# Altium PCB PCB_Layout.PcbDoc
Units mil, origin at the board's own origin, x right, y up, seen from the top; angles counter-clockwise.
Board outline 2880.03 x 1910.03 mil, 2 copper layers (Top Layer, Bottom Layer); 34 components, 53 nets, 148 pads, 0 vias.
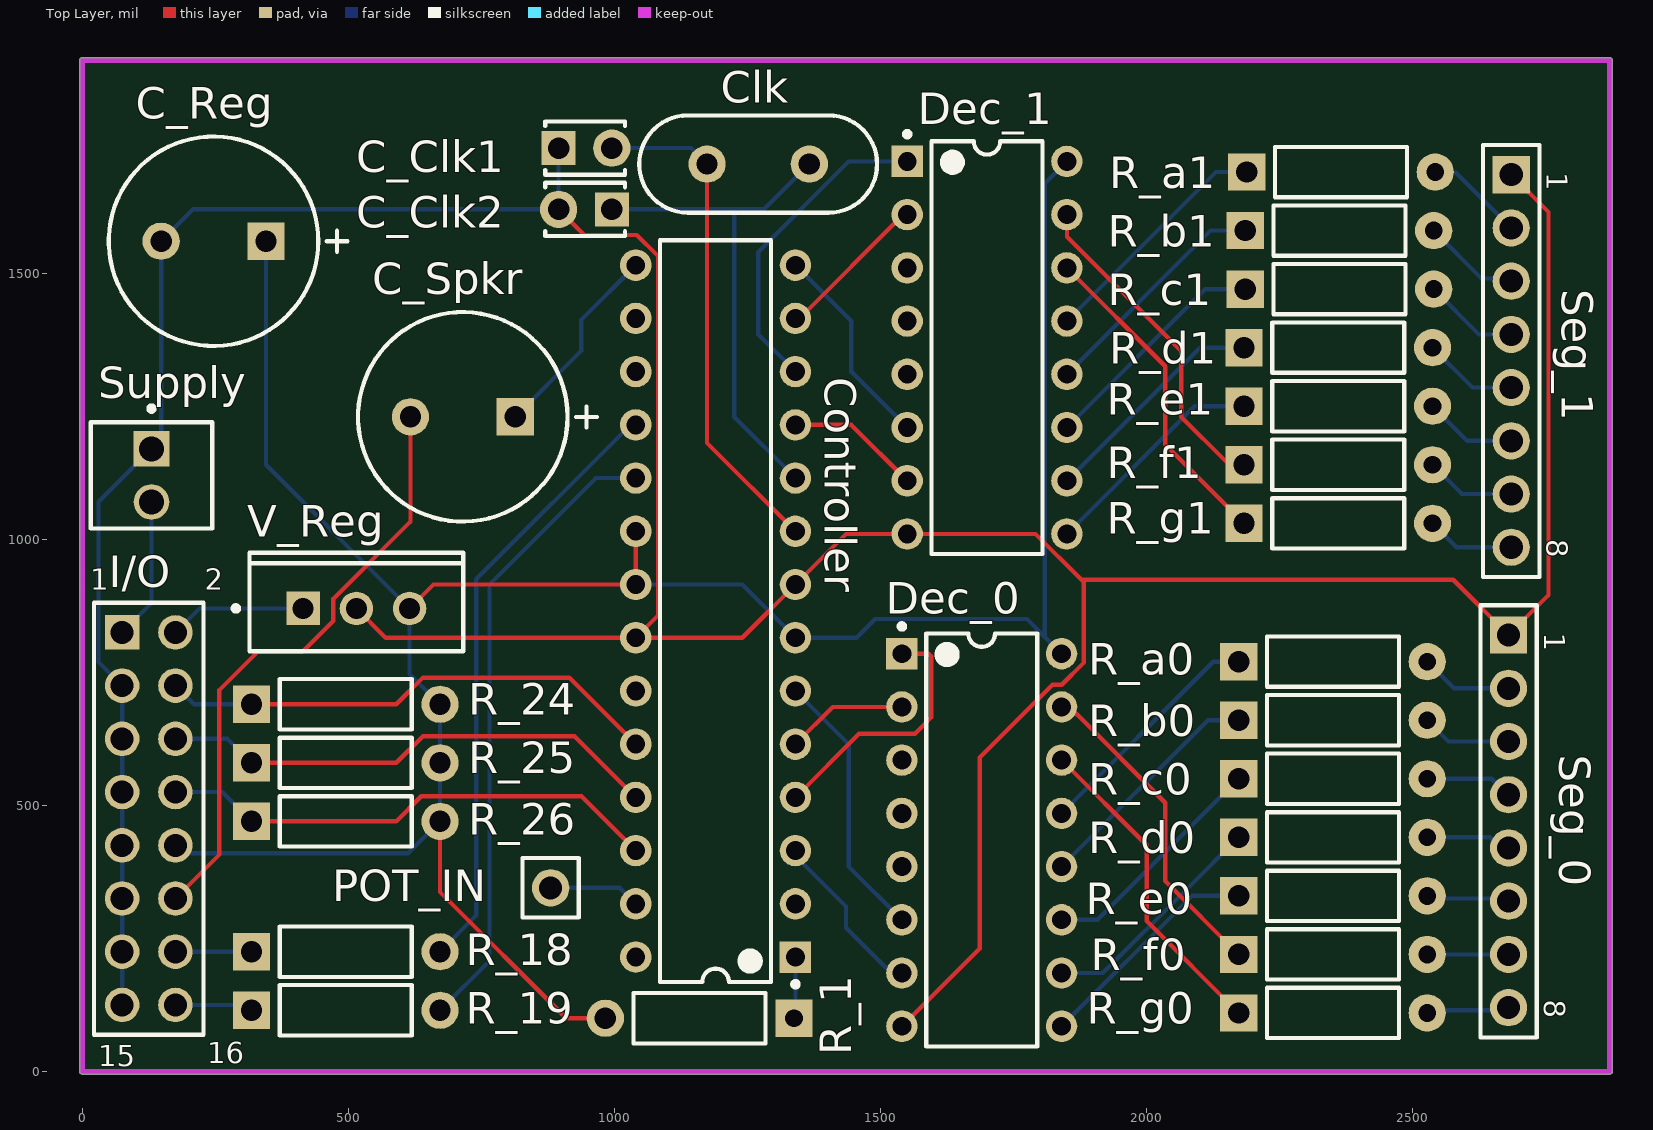
[diagram p0: Top Layer view]
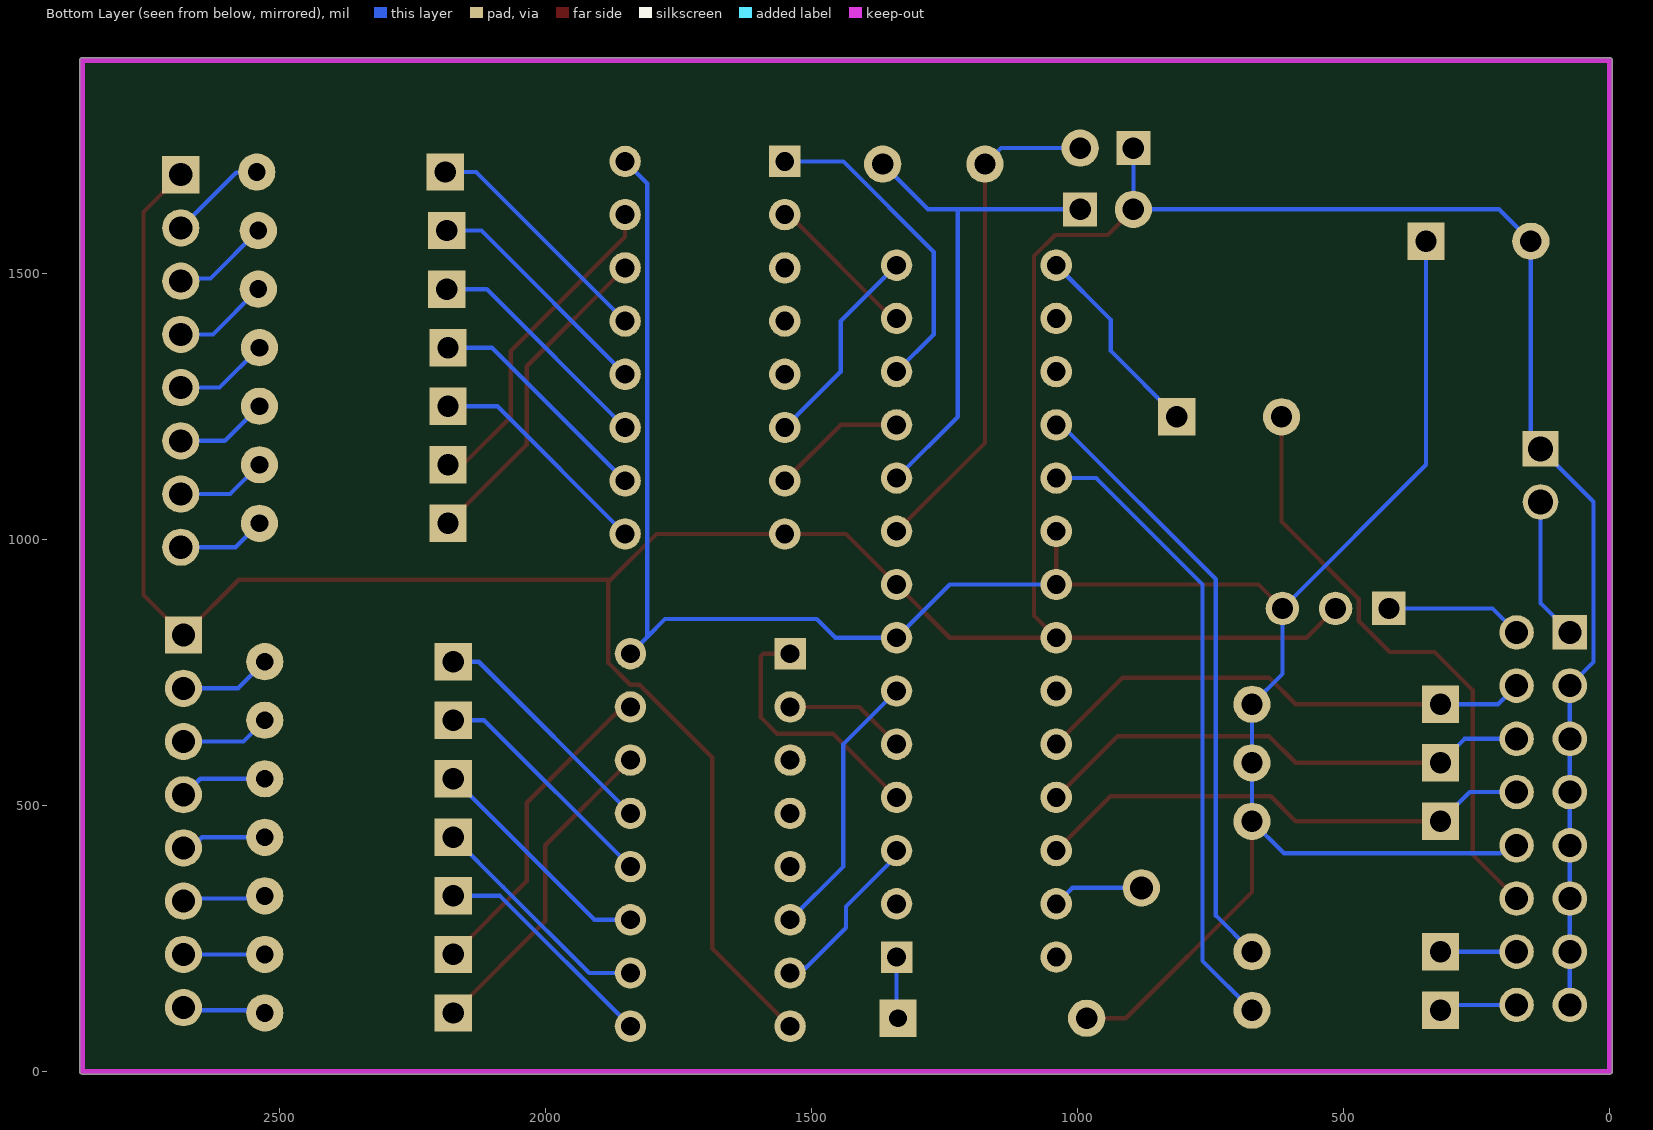
[diagram p1: Bottom Layer view, seen from below]

## Layer stack, top to bottom
Top Solder: solder mask 0.4, Solder Resist, Dk 3.5
Top Layer: signal copper 1.4
Dielectric 1: dielectric 12.6, FR-4, Dk 4.8
Bottom Layer: signal copper 1.4
Bottom Solder: solder mask 0.4, Solder Resist, Dk 3.5

## Board outline
0,-5.01 cw(c0,0) -5.01,0 -5.01,1900 cw(c0,1900) 0,1905.01 2870,1905.01 cw(c2870,1900) 2875.01,1900 2875.01,0 cw(c2870,0) 2870,-5.01

## Design rules (kind name [scope] priority, off if disabled: settings)
BoardOutlineClearance [All] p1: gap=7.87 ignorepadtopadclearanceinfootprint=FALSE
Clearance [All] p1: gap=8 ignorepadtopadclearanceinfootprint=FALSE except(9.84: Arc-Hole Track-Hole SMDPad-Hole THPad-Hole Via-Hole Fill-Hole Poly-Hole Region-Hole)
ComponentClearance [All] p1: gap=5 collisioncheckmode=3 verticalgap=5 showdistances=TRUE
DiffPairsRouting [All] p1: maxlimit=15 minlimit=8 mostfreqgap=8 toplayer_minwidth=8 toplayer_maxwidth=1000 toplayer_prefwidth=8 bottomlayer_minwidth=8 bottomlayer_maxwidth=1000 bottomlayer_prefwidth=8 maxuncoupledlength=8
Height [All] p1: minheight=0 maxheight=71497.94 prefheight=71497.94
HoleSize [All] p1: absolutevalues=TRUE maxlimit=248.03 minlimit=11.81 maxpercent=80.000 minpercent=20.000
HoleToHoleClearance [All] p1: gap=9.84 allowstackedmicrovias=TRUE
LayerPairs [All] p1: enforce=FALSE
MinimumAnnularRing [All] p1: minimumring=10
MinimumSolderMaskSliver [All] p1: minsoldermaskwidth=0
PlaneConnect PlaneConnectPowerPads [InPadClass('PowerPads')] p1: planeconnectstyle=Direct reliefexpansion=20 reliefentries=4 reliefconductorwidth=10 reliefairgap=10
PlaneConnect [All] p2: pad.planeconnectstyle=Relief pad.reliefexpansion=11.81 pad.reliefentries=4 pad.reliefconductorwidth=8 pad.reliefairgap=8 via.planeconnectstyle=Direct via.reliefexpansion=11.81 via.reliefentries=4 via.reliefconductorwidth=5 via.reliefairgap=10
PolygonConnect PolygonConnectPowerPads [All vs (InPadClass('PowerPads'))] p1: connectstyle=Direct reliefconductorwidth=10 reliefentries=4 polygonreliefangle="90 Angle" airgapwidth=10
PolygonConnect [All] p2: thpad.connectstyle=Relief thpad.reliefconductorwidth=8 thpad.reliefentries=4 thpad.polygonreliefangle="90 Angle" thpad.airgapwidth=8 smdpad.connectstyle=Relief smdpad.reliefconductorwidth=8 smdpad.reliefentries=4 smdpad.polygonreliefangle="90 Angle" smdpad.airgapwidth=8 via.connectstyle=Direct via.reliefconductorwidth=5 via.reliefentries=4 via.polygonreliefangle="90 Angle" via.airgapwidth=10
RoutingVias [All] p1: holewidth=11.81 width=23.62 viastyle="Through Hole" minholewidth=11.81 minwidth=23.62 maxholewidth=23.62 maxwidth=50
SilkToSilkClearance [All] p1: silktosilkclearance=0
SilkToSolderMaskClearance [IsPad] p1: minsilkscreentomaskgap=5 clearancetoexposedcopper=TRUE
SolderMaskExpansion [All] p1: expansion=4 istentingtop=FALSE
Width [All] p1: maxlimit=1000 minlimit=8 preferedwidth=8 minimp=50.000000 maximp=50.000000 favimp=50.000000
20 further rules are at their usual default settings.

## Components (designator, comment, footprint, x,y, rotation, side; value= is the part's Value field where it differs from the comment)
C_Clk1 "C315C220K1G5TA" KEMT-C315-THT-2 945,1735 r0 top
C_Clk2 "C315C220K1G5TA" KEMT-C315-THT-2 945,1620 r180 top
C_Reg "EEU-EE2G100" PNSC-EEU-EE2G100-2_V 246.57,1560 r180 top
C_Spkr "EEU-EE2G100" PNSC-EEU-EE2G100-2_V 715,1230 r180 top
Clk "FOXSLF/120-20" FOX-FOXSLF-2_V 1270,1705 r0 top
Controller "ATmega328-PU" 28P3 1190,865 r180 top
Dec_0 "SN74LS247N" N0016A 1690,435 r0 top
Dec_1 "SN74LS247N" N0016A 1700,1360 r0 top
I/O "61301621121" 61301621121 125,475 r270 top
POT_IN "61300111121" 61300111121 880,345 r90 top
R_1 "MFR-25FBF52-1K" RESA60-630X240#1 1160,100 r180 top
R_18 "FR-25FF52-1K" RESA60-630X240#2 495,225 r0 top
R_19 "MFR-25FBF52-1K" RESA60-630X240#2 495,115 r0 top
R_24 "MFR-25FBF52-1K" RESA60-630X240#2 495,690 r0 top
R_25 "MFR-25FBF52-1K" RESA60-630X240#2 495,580 r0 top
R_26 "MFR-25FBF52-1K" RESA60-630X240#2 495,470 r0 top
R_a0 "MFR-25FBF52-1K" RESA60-630X240#3 2350,770 r0 top
R_a1 "MFR-25FBF52-1K" RESA60-630X240#3 2365,1690 r0 top
R_b0 "MFR-25FBF52-1K" RESA60-630X240#3 2350,660 r0 top
R_b1 "MFR-25FBF52-1K" RESA60-630X240#3 2362.17,1580 r0 top
R_c0 "MFR-25FBF52-1K" RESA60-630X240#3 2350,550 r0 top
R_c1 "MFR-25FBF52-1K" RESA60-630X240#3 2362.17,1470 r0 top
R_d0 "MFR-25FBF52-1K" RESA60-630X240#3 2350,440 r0 top
R_d1 "MFR-25FBF52-1K" RESA60-630X240#3 2360,1360 r0 top
R_e0 "MFR-25FBF52-1K" RESA60-630X240#3 2350,330 r0 top
R_e1 "MFR-25FBF52-1K" RESA60-630X240#3 2360,1250 r0 top
R_f0 "MFR-25FBF52-1K" RESA60-630X240#3 2350,220 r0 top
R_f1 "MFR-25FBF52-1K" RESA60-630X240#3 2360,1140 r0 top
R_g0 "MFR-25FBF52-1K" RESA60-630X240#3 2350,110 r0 top
R_g1 "MFR-25FBF52-1K" RESA60-630X240#3 2360,1030 r0 top
Seg_0 "61300811121" 61300811121 2680,470 r270 top
Seg_1 "61300811121" 61300811121 2685,1335 r270 top
Supply "22-27-2021" MOLX-22-27-2021_V 130,1120 r270 top
V_Reg "LM7805CT" FAIR-TO-220-3 515,870 r90 top

## Footprints (in the part's own frame and the unit in brackets; to place one, negate y for a bottom-side part, rotate by r counter-clockwise, add the part's x,y. Pads: shape width x height; smd on the part's side, far side on the other; paste and mask are expansions set on the pad)
28P3 [mm] "28-Pin Plastic Dual In-Line Package (PDIP)"
  rect 1.5x1.5 hole 0.9: 1(-3.81,16.51)
  round 1.5 hole 0.9: 2(-3.81,13.97) 3(-3.81,11.43) 4(-3.81,8.89) 5(-3.81,6.35) 6(-3.81,3.81) 7(-3.81,1.27) 8(-3.81,-1.27) 9(-3.81,-3.81) 10(-3.81,-6.35) 11(-3.81,-8.89) 12(-3.81,-11.43) 13(-3.81,-13.97) 14(-3.81,-16.51) 15(3.81,-16.51) 16(3.81,-13.97) 17(3.81,-11.43) 18(3.81,-8.89) 19(3.81,-6.35) 20(3.81,-3.81) 21(3.81,-1.27) 22(3.81,1.27) 23(3.81,3.81) 24(3.81,6.35) 25(3.81,8.89) 26(3.81,11.43) 27(3.81,13.97) 28(3.81,16.51)
  silkscreen extent -3.94,-17.7 2.65,17.93, body extent -3.6,-17.65 3.6,17.65, height 4.58
61300111121 [mil] "Pin Header, pitch 2.54 mm, THT, Vertical, single row, 1p"
  round 70 hole 43.31: 1(0,0)
  silkscreen extent -56,-53 56,53, body extent -50,-50 50,50, height 337
61300811121 [mil] "Pin Header, pitch 2.54 mm, THT, Vertical, single row, 8p"
  rect 70x70 hole 43.31: 1(-350,0)
  round 70 hole 43.31: 2(-250,0) 3(-150,0) 4(-50,0) 5(50,0) 6(150,0) 7(250,0) 8(350,0)
  silkscreen extent -406,-53 406,53, body extent -400,-50 400,50, height 337
61301621121 [mm] "Pin Header, pitch 2.54 mm, THT, Vertical, dual row, 16p"
  rect 1.65x1.65 hole 1.1: 1(-8.89,-1.27)
  round 1.65 hole 1.1: 2(-8.89,1.27) 3(-6.35,-1.27) 4(-6.35,1.27) 5(-3.81,-1.27) 6(-3.81,1.27) 7(-1.27,-1.27) 8(-1.27,1.27) 9(1.27,-1.27) 10(1.27,1.27) 11(3.81,-1.27) 12(3.81,1.27) 13(6.35,-1.27) 14(6.35,1.27) 15(8.89,-1.27) 16(8.89,1.27)
  silkscreen extent -10.31,-2.62 10.31,2.62, body extent -10.16,-2.54 10.16,2.54, height 8.59
FAIR-TO-220-3 [mm] "FM, 3-Leads, Body 10.2x4.7mm, Pitch 2.54mm"
  rect 1.6x1.6 hole 1: 1(0,2.54)
  round 1.6 hole 1: 2(0,0) 3(0,-2.54)
  silkscreen extent -2.04,-5.1 2.66,5.87, body extent -2.04,-5.1 2.66,5.1, height 18.95
FOX-FOXSLF-2_V [mil] "THD, 2-Leads, Body 11.35x4.65mm, Pitch 4.88mm"
  round 70 hole 40: 1(-96.06,0) 2(96.06,0)
  silkscreen extent -223,-92 223,92, body extent -223,-92 223,92, height 142
KEMT-C315-THT-2 [mil] "THD, 2-Leads, Body 3.81x2.54mm"
  rect 64x64 hole 40: 1(-50,0)
  round 70 hole 40: 2(50,0)
  silkscreen extent -75,-50 75,50, body extent -75,-50 75,50, height 183
MOLX-22-27-2021_V [mm] "Header, 2-Leads, Body 5.8x5.08mm"
  rect 1.7x1.7 hole 1.19: 1(-1.27,0)
  round 1.7 hole 1.19: 2(1.27,0)
  silkscreen extent -3.31,-2.9 2.54,2.9, body extent -2.54,-2.9 2.54,2.9, height 11.72
N0016A [mm] "DIP, 16-Leads, Body 19.7x6.6mm, Pitch 2.54mm"
  rect 1.5x1.5 hole 0.9: 1(-3.81,8.89)
  round 1.5 hole 0.9: 2(-3.81,6.35) 3(-3.81,3.81) 4(-3.81,1.27) 5(-3.81,-1.27) 6(-3.81,-3.81) 7(-3.81,-6.35) 8(-3.81,-8.89) 9(3.81,-8.89) 10(3.81,-6.35) 11(3.81,-3.81) 12(3.81,-1.27) 13(3.81,1.27) 14(3.81,3.81) 15(3.81,6.35) 16(3.81,8.89)
  silkscreen extent -3.93,-9.85 2.65,10.31, body extent -3.95,-9.85 3.95,9.85, height 5.08
PNSC-EEU-EE2G100-2_V [mil] "Through-hole, 2-Leads, Base 10x10mm, Height 22mm"
  rect 70x70 hole 40: 1(-98.43,0)
  round 70 hole 40: 2(98.43,0)
  silkscreen extent -252,-197 197,197, body extent -197,-197 197,197, height 866
RESA60-630X240#1 [mil] "Axial Resistor, 2-Leads, Dia 2.4mm, Body Length 6.3mm"
  rect 70x70 hole 33.46: 1(-177.17,0)
  round 70 hole 40: 2(177.17,0)
  silkscreen extent -124,-47 124,47, body extent -124,-47 124,47, height 94
RESA60-630X240#2 [mil] "Axial Resistor, 2-Leads, Dia 2.4mm, Body Length 6.3mm"
  rect 70x70 hole 40: 1(-177.17,0)
  round 70 hole 40: 2(177.17,0)
  silkscreen extent -124,-47 124,47, body extent -124,-47 124,47, height 94
RESA60-630X240#3 [mil] "Axial Resistor, 2-Leads, Dia 2.4mm, Body Length 6.3mm"
  rect 70x70 hole 40: 1(-177.17,0)
  round 70 hole 33.46: 2(177.17,0)
  silkscreen extent -124,-47 124,47, body extent -124,-47 124,47, height 94

## Part data
C_Clk1 C_Clk2: library part CMP-1664-00008-1, "Capacitor, Ceramic, 22 pF, +/-10 %, 100 V, -55 to 125 degC, 2-Pin THD, RoHS, Bulk", Case\Package=TO-220, Max Input Voltage="40 V", Max Operating Temperature="125 degC", Max Ouput Current="1.5 A", Min Input Voltage="4.2 V", Min Operating Temperature="0 degC", Output Voltage="1.2 V", Package Quantity=50, ComponentLink1Description="Manufacturer URL", ComponentLink1URL=http://www.kemet.com/, ComponentLink2Description=Datasheet, ComponentLink2URL=http://capacitoredge.kemet.com/capedge2/DataSheet/Datasheet-C315C220K1G5TA.pdf?pn=C315C220K1G5TA{BULK}, DatasheetVersion=Aug-16, Height="9.28 mm", Length="10.28 mm", Mount="Through Hole", Output Current="1.5 A", Outputs=1, PackageDescription="2-Pin Through Hole Device, Body 3.81 x 2.54 mm", PackageReference=C315-THT-2, Packaging=Rail/Tube, Pins=3, Radiation Hardening=No, REACH SVHC="No SVHC", RoHSCompliant=true, Weight="0.08113 oz", Width="4.82 mm"
C_Reg C_Spkr: library part CMP-0736-00002-1, "Aluminum Electrolytic Capacitor, 10 uF +/- 20%, 400 V, -25 to 105 degC, 2-Pin 10 x 10 x 22 mm Through-hole, RoHS, Tape and Reel", Capacitance Tolerance="+/- 20%", Manufacturer=Panasonic, Rated Voltage="400 V", Ripple Current="430 mA", Temp. Range="-25 to 105 degC", Cap.="10 uF", ComponentLink1Description="Manufacturer URL", ComponentLink1URL=http://industrial.panasonic.com/, ComponentLink2Description=Datasheet, ComponentLink2URL=http://industrial.panasonic.com/www-data/pdf/ABA0000/ABA0000CE113.pdf, ComponentLink3Description="Package Specification", ComponentLink3URL=http://industrial.panasonic.com/www-data/pdf/ABA0000/ABA0000PE245.pdf, DatasheetVersion=Nov-12, Mounting Technology="Through Hole", PackageDescription="2-Pin Through-hole, Base 10 x 10 mm, Height 22 mm", PackageReference=EEU-EE2G100-2, PackageVersion=Nov-12, Packing="Tape and Reel", PartNumber=EEU-EE2G100, RoHS=TRUE
Clk: library part CMP-1749-00004-1, "Resistance Weld Thru-Hole Crystal, 12 MHz, +/-30 ppm, -20 to 70 degC, 2-Pin THD, RoHS, Bulk", Case\Package=TO-251-3, Input Capacitance="350 pF", Max Operating Temperature="150 degC", Max Power Dissipation="2.5 W", Min Operating Temperature="-55 degC", Package Quantity=70, ComponentLink1Description="Manufacturer URL", ComponentLink1URL=http://www.foxonline.com/, ComponentLink2Description=Datasheet, ComponentLink2URL=http://www.foxonline.com/pdfs/hc49slf.pdf, DatasheetVersion=Mar-15, Elements=1, Height="6.1 mm", Length="6.6 mm", Mount="Through Hole", PackageDescription="2-Pin Through Hole Device, Body 11.35 x 4.65 mm, Pitch 4.88 mm", PackageReference=FOXSLF-2, Packaging=Rail/Tube, Pins=3, Radiation Hardening=No, Rds On Max="115 mohm", REACH SVHC="No SVHC", RoHSCompliant=true, Typical Rise Time="90 ns", Width="2.3 mm"
Controller: library part CMP-0095-00015-2, "8-bit AVR Microcontroller, 32KB Flash, 1KB EEPROM, 2KB SRAM, 28-pin PDIP, Industrial Grade (-40°C to 85°C)", ComponentLink1Description="Manufacturer URL", ComponentLink1URL=http://www.atmel.com/, ComponentLink2Description="ATmega48A/48PA/88A/88PA/168A/168PA/328/328P Datasheet", ComponentLink2URL=http://www.atmel.com/dyn/resources/prod_documents/8271.pdf, ComponentLink3Description="ATmega48A/48PA/88A/88PA/168A/168PA/328/328P Summary", ComponentLink3URL=http://www.atmel.com/dyn/resources/prod_documents/8271S.pdf, DatasheetVersion="revD, May-2011", PackageDescription="28-lead (0.300\"/7.62mm Wide) Plastic Dual Inline Package (PDIP)", PackageReference=28P3, PackageVersion="revB, Sep-2001", RevisionNote="DatasheetVersion updated. URLs added."
Dec_0 Dec_1: library part CMP-0388-00310-2, "BCD-to-7-Segment Decoder / Driver, 4.75 to 5.25 V, 0 to 70 degC, 16-pin DIP (N16), Pb-Free (RoHS)", Manufacturer="Texas Instruments", Rating=Catalog, Code_JEDEC=MS-001, ComponentLink1Description="Manufacturer URL", ComponentLink1URL=http://www.ti.com/, ComponentLink2Description=Datasheet, ComponentLink2URL=http://www.ti.com/general/docs/lit/getliterature.tsp?genericPartNumber=SN74LS247&fileType=pdf, ComponentLink3Description="Package Specification", ComponentLink3URL=http://www.ti.com/litv/pdf/mpdi002c, DatasheetVersion=SDLS083, Eco-Plan="Pb-Free (RoHS)", Mounting Technology="Through Hole", PackageDescription="16-Pin Plastic In-Line, Body 19.305 x 6.35 mm, Pitch 2.54 mm", PackageReference=N0016A, PackageVersion=4040049/E, PartNumber=SN74LS247N, SubFamily="Discrete Segment LED Driver", Vin(Max)(V)=5.25, Vin(Min)(V)=4.75
I/O: library part CMP-1502-01097-1, "THT Vertical Pin Header WR-PHD, Pitch 2.54 mm, Dual Row, 16 pins", Contact Resistance=20mOhm, Manufacturer="Wurth Elektronik", Operating Temperature=-40to105degC, Rated Current=3A, Withstanding Voltage=500VAC, Working Voltage=250VAC, Datasheet URL=https://katalog.we-online.de/em/datasheet/6130xx21121.pdf, Gender=Male, Manufacturer URL=http://www.we-online.de, Mounting Technology=THT, Orientation=Vertical, Package Reference=61301621121, Packaging=Bag, Part Number=61301621121, Pin Number=16, Pitch=2.54mm, Publisher=WurthElektronik, Row Number=Dual
POT_IN: library part CMP-1502-01058-1, "THT Vertical Pin Header WR-PHD, Pitch 2.54 mm, Single Row, 1 pins", Contact Resistance=20mOhm, Manufacturer="Wurth Elektronik", Operating Temperature=-40to105degC, Rated Current=3A, Withstanding Voltage=500VAC, Working Voltage=250VAC, Datasheet URL=https://katalog.we-online.de/em/datasheet/6130xx11121.pdf, Gender=Male, Manufacturer URL=http://www.we-online.de, Mounting Technology=THT, Orientation=Vertical, Package Reference=61300111121, Packaging=Bag, Part Number=61300111121, Pin Number=1, Pitch=2.54mm, Publisher=WurthElektronik, Row Number=Single
R_1 R_18 R_19 R_24 R_25 R_26 R_a0 R_a1 R_b0 R_b1 R_c0 R_c1 R_d0 R_d1 R_e0 R_e1 R_f0 R_f1 R_g0 R_g1: library part CMP-1659-00075-1, "Axial Resistor, 1 KOhm, +/- 1%, 250 mW, -55 to 155 degC, 2-Pin THD, RoHS, Bulk", Case\Package=Axial, Max Operating Temperature="155 degC", Min Operating Temperature="-55 degC", Package Quantity=200, Power Rating="250 mW", Resistance="10 kohm", Tolerance=1%, Voltage Rating="250 V", ComponentLink1Description="Manufacturer URL", ComponentLink1URL=http://www.yageo.com/, ComponentLink2Description=Datasheet, ComponentLink2URL=http://www.yageo.com/documents/recent/Yageo%20LR_MFR_2013.pdf, DatasheetVersion=Apr-13, Length="0.248 inch", PackageDescription="2-Pin Axial Lead, Dia 2.4 mm, Body Length 6.3 mm", PackageReference=MFR-25, Packaging=Bulk, RoHSCompliant=true
Seg_0 Seg_1: library part CMP-1502-01076-1, "THT Vertical Pin Header WR-PHD, Pitch 2.54 mm, Single Row, 8 pins", Contact Resistance=20mOhm, Manufacturer="Wurth Elektronik", Operating Temperature=-40to105degC, Rated Current=3A, Withstanding Voltage=500VAC, Working Voltage=250VAC, Datasheet URL=https://katalog.we-online.de/em/datasheet/6130xx11121.pdf, Gender=Male, Manufacturer URL=http://www.we-online.de, Mounting Technology=THT, Orientation=Vertical, Package Reference=61300811121, Packaging=Bag, Part Number=61300811121, Pin Number=8, Pitch=2.54mm, Publisher=WurthElektronik, Row Number=Single
Supply: library part CMP-2000-05537-1, "Male Header, Pitch 2.54 mm, 1 x 2 Position, Height 11.7 mm, Tail Length 3.56 mm, 0 to 75 degC, RoHS, Bulk", Current - Max=4A, Manufacturer=Molex, Operating Temperature=0°Cto+75°C, Package Description="2-Leads Header, Body 5.08 x 5.8 mm, Pitch 2.54 mm", Package Version="Rev. BC, 02/2012", PartNumber=0022272021, Voltage - Max=250V, Contact Material=Tinplatedbrass, Current Rating=4A, Datasheet URL=http://www.molex.com/pdm_docs/sd/022272021_sd.pdf, Datasheet Version="Rev. F, 06/2009", Housing material=Nylon(UL94V-0), Manufacturer URL=http://www.molex.com/, Mounting Technology=ThroughHole, No. of Positions=2, No. of Rows=1, Orientation=Vertical, Package Reference=22-27-2021, Pitch=2.54mm, Voltage Rating=250V
V_Reg: library part CMP-2000-04938-1, "Positive Voltage Regulator, 5 V, 1 A, -40 to 125 degC, 3-Pin TO-220, RoHS, Tube", Manufacturer=FairchildSemiconductor, Maximum Input Voltage=35V, Maximum Output Current=2.2(Typ)A, Maximum Quiescent Current=8mA, Operating Temperature=-40to125degC, Output Voltage=5V, Package=3TO-220AB, Package Description="3-Pin Through Hole Device, Body 10 x 4.5 mm, Pitch 2.54 mm", Package Reference=TO-220, Typical Dropout Voltage @ Current=2@1AV, Accuracy=±4%, Category=LinearRegulator, Datasheet URL=https://datasheet.ciiva.com/26904/lm7805ct-26904988.pdf, Datasheet Version=Aug-12, Line Regulation=100mV, Load Regulation=100mV, Manufacturer URL=https://www.fairchildsemi.com/, Mounting=ThroughHole, Number of Outputs=1, Output Type=Fixed, Package URL=https://www.fairchildsemi.com/package-drawings/TO/TO220B03.pdf, Packaging=Rail/Tube, Polarity=Positive, Rad Hard=No, Type=Linear

## Nets (pads, with @x,y where several pads share a name; then routed paths per layer and width w, separated by ;. In a path a pad name is that pad's centre, name@x,y a point inside that pad or via, vN(x,y) a via of type N, cw(c..) or ccw(c..) an arc to the next point about the centre after c; other vN are vias at no path point)
NetC_Clk1_1: C_Clk1.1 C_Clk2.2 C_Reg.2 Controller.8 Controller.22 Dec_0.8 Dec_1.8 I/O.3 I/O.5 I/O.7 I/O.9 I/O.11 I/O.13 I/O.15 Seg_0.1 Seg_1.1 Supply.1 V_Reg.2 | length 7610.7
  Top Layer w8: V_Reg.2 570,815 Controller.22 ; C_Clk2.2 943.03,1571.97 1041.76,1571.97 1081.53,1532.2 1081.53,856.53 Controller.22 ; Dec_0.8 1686.28,231.28 1686.28,590.01 1822.8,726.53 1840.26,726.53 1881.53,767.8 1881.53,919.74 1877.41,923.86 ; Seg_1.1 2755,1615 2755,895 Seg_0.1 2576.14,923.86 1877.41,923.86 ; Controller.22 1240,815 Controller.8 1435,1010 Dec_1.8 1791.27,1010 1877.41,923.86
  Bottom Layer w8: I/O.15 I/O.13 I/O.11 I/O.9 I/O.7 I/O.5 I/O.3 30.52,769.48 30.52,1070.52 Supply.1 148.15,1188.15 C_Reg.2 208.15,1620 C_Clk2.2 C_Clk1.1
NetC_Clk1_2: C_Clk1.2 Clk.1 Controller.9 | length 950.1
  Top Layer w8: Clk.1 1173.94,1181.06 Controller.9
  Bottom Layer w8: C_Clk1.2 1143.94,1735 Clk.1
NetC_Clk2_1: C_Clk2.1 Clk.2 Controller.10 | length 958.9
  Bottom Layer w8: C_Clk2.1 1225,1620 ; Controller.10 1225,1230 1225,1620 ; Clk.2 1281.06,1620 1225,1620
NetC_Reg_1: C_Reg.1 Controller.7 Controller.20 Controller.21 Dec_0.16 Dec_1.16 I/O.10 R_1.2 R_24.2 R_25.2 R_26.2 V_Reg.3 | length 4632.6
  Top Layer w8: V_Reg.3 660,915 Controller.21 Controller.20 ; R_26.2 672.17,337.17 909.33,100 R_1.2
  Bottom Layer w8: I/O.10 190.41,425 205.41,410 612.17,410 R_26.2 R_25.2 R_24.2 615,747.17 V_Reg.3 345,1140 C_Reg.1 ; Controller.21 1240,915 Controller.7 1455,815 1490,850 1775,850 1808.47,816.53 ; Dec_0.16 1808.47,816.53 ; Dec_1.16 1808.47,1668.47 1808.47,816.53
NetC_Spkr_1: C_Spkr.1 Controller.15 | length 378.9
  Bottom Layer w8: C_Spkr.1 937.33,1353.9 937.33,1412.33 Controller.15
NetC_Spkr_2: C_Spkr.2 I/O.12 | length 1137.2
  Top Layer w8: I/O.12 257.51,407.51 257.51,716.65 329.12,788.26 413.22,788.26 471.5,846.54 471.5,888.02 616.57,1033.09 C_Spkr.2
NetController_1: Controller.1 R_1.1 | length 152.3
  Bottom Layer w8: R_1.1 1340,102.83 Controller.1 Controller.1@1365.53,189.47
NetController_3: Controller.3 Dec_0.7 | length 324.6
  Bottom Layer w8: Controller.3 1340,405 1435,310 1435,270 1510.23,194.77 1530.23,194.77 Dec_0.7
NetController_4: Controller.4 Dec_0.1 | length 489.4
  Top Layer w8: Controller.4 1459.61,634.61 1564.61,634.61 1595,665 1595,780.31 1590.31,785 Dec_0.1
NetController_5: Controller.5 Dec_0.2 | length 229
  Top Layer w8: Controller.5 1410,685 Dec_0.2
NetController_6: Controller.6 Dec_0.6 | length 512.8
  Bottom Layer w8: Controller.6 1440,615 1440,385 Dec_0.6
NetController_11: Controller.11 Dec_1.7 | length 253.5
  Top Layer w8: Controller.11 1445,1215 Dec_1.7
NetController_12: Controller.12 Dec_1.1 | length 604.4
  Bottom Layer w8: Controller.12 1270,1385 1270,1540 1440,1710 Dec_1.1
NetController_13: Controller.13 Dec_1.2 | length 290.8
  Top Layer w8: Controller.13 1347.5,1415 1542.5,1610 Dec_1.2
NetController_14: Controller.14 Dec_1.6 | length 392
  Bottom Layer w8: Controller.14 1445,1410 1445,1315 Dec_1.6
NetController_18: Controller.18 R_18.2 | length 1148.6
  Top Layer w8: Controller.18@1039.74,1214.74 Controller.18
  Bottom Layer w8: R_18.2 740,292.83 740,925 1030,1215 Controller.18
NetController_19: Controller.19 R_19.2 | length 1196.7
  Top Layer w8: Controller.19@1039.74,1114.74 Controller.19
  Bottom Layer w8: R_19.2 765,207.83 765,915 965,1115 Controller.19
NetController_24: Controller.24 I/O.4 R_24.1 | length 952
  Top Layer w8: R_24.1 590,690 640,740 915,740 Controller.24
  Bottom Layer w8: I/O.4 210,690 R_24.1
NetController_25: Controller.25 I/O.6 R_25.1 | length 952
  Top Layer w8: R_25.1 590,580 640,630 925,630 Controller.25
  Bottom Layer w8: I/O.6 272.83,625 R_25.1
NetController_26: Controller.26 I/O.8 R_26.1 | length 949.5
  Top Layer w8: R_26.1 590,470 637,517 938,517 Controller.26
  Bottom Layer w8: I/O.8 262.83,525 R_26.1
NetController_27: Controller.27 POT_IN.1 | length 181.2
  Bottom Layer w8: POT_IN.1 1010,345 Controller.27 Controller.27@1031.27,315
NetDec_0_9: Dec_0.9 R_e0.1 | length 434.3
  Bottom Layer w8: Dec_0.9 2085,330 R_e0.1
NetDec_0_10: Dec_0.10 R_d0.1 | length 438.5
  Bottom Layer w8: Dec_0.10 1917.37,185 2078.37,346 2078.83,346 R_d0.1
NetDec_0_11: Dec_0.11 R_c0.1 | length 442.6
  Bottom Layer w8: Dec_0.11 1907.83,285 R_c0.1
NetDec_0_12: Dec_0.12 R_b0.1 | length 446.7
  Bottom Layer w8: Dec_0.12 2115,660 R_b0.1
NetDec_0_13: Dec_0.13 R_a0.1 | length 450.9
  Bottom Layer w8: Dec_0.13 2125,770 R_a0.1
NetDec_0_14: Dec_0.14 R_g0.1 | length 612.9
  Top Layer w8: Dec_0.14 2000,425 2000,282.83 R_g0.1
NetDec_0_15: Dec_0.15 R_f0.1 | length 611.7
  Top Layer w8: Dec_0.15 1853.82,685 1867.68,671.14 1868.86,671.14 2035,505 2035,357.83 R_f0.1
NetDec_1_9: Dec_1.9 R_e1.1 | length 432.2
  Bottom Layer w8: Dec_1.9 2090,1250 R_e1.1
NetDec_1_10: Dec_1.10 R_d1.1 | length 436.4
  Bottom Layer w8: Dec_1.10 2100,1360 R_d1.1
NetDec_1_11: Dec_1.11 R_c1.1 | length 442.7
  Bottom Layer w8: Dec_1.11 2110,1470 R_c1.1
NetDec_1_12: Dec_1.12 R_b1.1 | length 446.8
  Bottom Layer w8: Dec_1.12 2120,1580 R_b1.1
NetDec_1_13: Dec_1.13 R_a1.1 | length 453.8
  Bottom Layer w8: Dec_1.13 2130,1690 R_a1.1
NetDec_1_14: Dec_1.14 R_g1.1 | length 617.9
  Top Layer w8: Dec_1.14 2035,1325 2035,1177.83 R_g1.1
NetDec_1_15: Dec_1.15 R_f1.1 | length 624.2
  Top Layer w8: Dec_1.15 1850.26,1609.74 1850.26,1568.47 2065,1353.73 2065,1230 2148.95,1146.05 2176.78,1146.05 R_f1.1
NetI/O_1: I/O.1 Supply.2 | length 267.8
  Bottom Layer w8: I/O.1 130,880 Supply.2
NetI/O_2: I/O.2 V_Reg.1 | length 258.6
  Bottom Layer w8: I/O.2 220,870 V_Reg.1
NetI/O_14: I/O.14 R_18.1 | length 142.8
  Bottom Layer w8: I/O.14 R_18.1
NetI/O_16: I/O.16 R_19.1 | length 147
  Bottom Layer w8: I/O.16 307.83,125 R_19.1
NetR_a0_2: R_a0.2 Seg_0.2 | length 173.5
  Bottom Layer w8: R_a0.2 2577.17,720 Seg_0.2
NetR_a1_2: R_a1.2 Seg_1.2 | length 186.3
  Bottom Layer w8: R_a1.2 2542.91,1689.26 2580.74,1689.26 Seg_1.2
NetR_b0_2: R_b0.2 Seg_0.3 | length 169.4
  Bottom Layer w8: R_b0.2 2567.17,620 Seg_0.3
NetR_b1_2: R_b1.2 Seg_1.3 | length 185
  Bottom Layer w8: R_b1.2 2629.29,1490.04 2679.96,1490.04 Seg_1.3
NetR_c0_2: R_c0.2 Seg_0.4 | length 165.3
  Bottom Layer w8: R_c0.2 2648.49,550 2678.49,520 Seg_0.4
NetR_c1_2: R_c1.2 Seg_1.4 | length 180.9
  Bottom Layer w8: R_c1.2 2624.33,1385 Seg_1.4
NetR_d0_2: R_d0.2 Seg_0.5 | length 161.1
  Bottom Layer w8: R_d0.2 2645.12,440 2665.12,420 Seg_0.5
NetR_d1_2: R_d1.2 Seg_1.5 | length 178.9
  Bottom Layer w8: R_d1.2 2612.17,1285 Seg_1.5
NetR_e0_2: R_e0.2 Seg_0.6 | length 157
  Bottom Layer w8: R_e0.2 2532.17,325 2675,325 Seg_0.6
NetR_e1_2: R_e1.2 Seg_1.6 | length 174.8
  Bottom Layer w8: R_e1.2 2602.17,1185 Seg_1.6
NetR_f0_2: R_f0.2 Seg_0.7 | length 152.8
  Bottom Layer w8: R_f0.2 Seg_0.7
NetR_f1_2: R_f1.2 Seg_1.7 | length 170.6
  Bottom Layer w8: R_f1.2 2592.17,1085 Seg_1.7
NetR_g0_2: R_g0.2 Seg_0.8 | length 157
  Bottom Layer w8: R_g0.2 2532.17,115 2675,115 Seg_0.8
NetR_g1_2: R_g1.2 Seg_1.8 | length 166.5
  Bottom Layer w8: R_g1.2 2582.17,985 Seg_1.8
pads on no net: Controller.2 Controller.16 Controller.17 Controller.23 Controller.28 Dec_0.3 Dec_0.4 Dec_0.5 Dec_1.3 Dec_1.4 Dec_1.5

## Keep-outs
Keep-Out Layer:
  lines w10: 0,0 2870,0 2870,1900 0,1900 0,0

## Text inside footprints (layer, text, board x,y; h text height)
I/O: Top Overlay "16" at 235,15 h40; Top Overlay "15" at 30,10 h40; Top Overlay "1" at 15,905 h40; Top Overlay "2" at 230,905 h40
Seg_0: Top Overlay "8" at 2746.93,134.96 h40 r270; Top Overlay "1" at 2746.93,824.72 h40 r270
Seg_1: Top Overlay "8" at 2751.93,999.96 h40 r270; Top Overlay "1" at 2751.93,1689.72 h40 r270